# EAGLE board BLE -- HM-10 -- Breakout v0.9.4 (EAGLE 6.5.0)
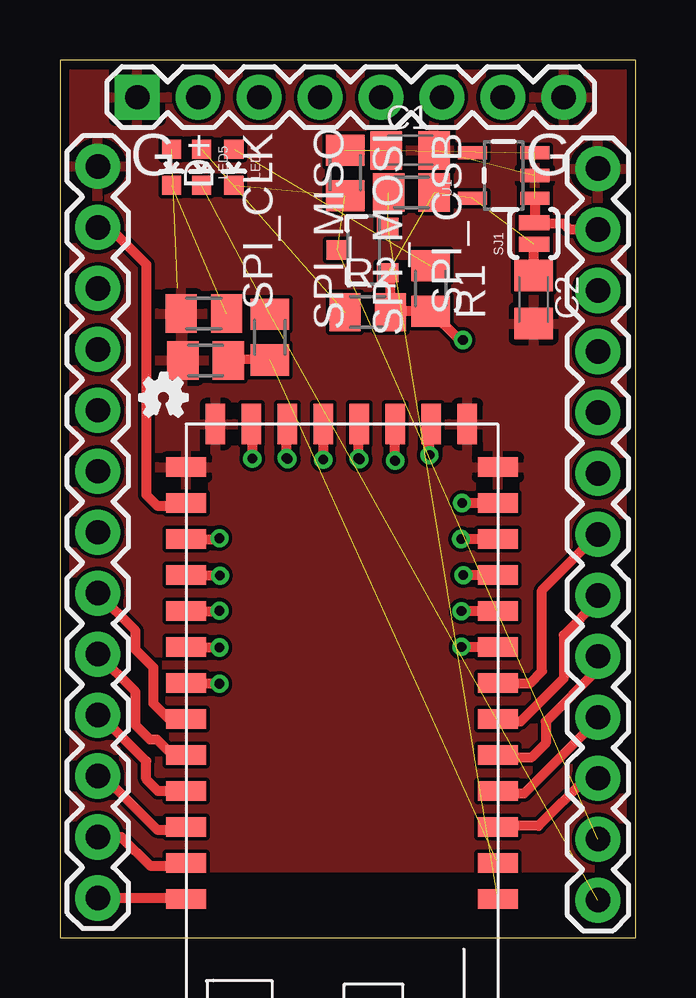
[diagram p0: board, top side]
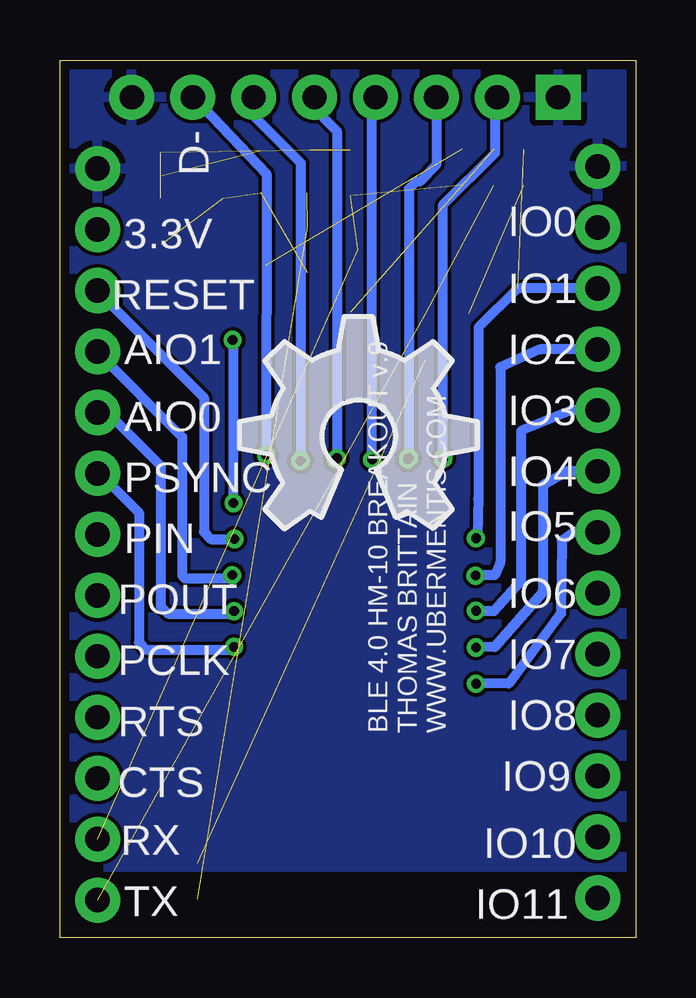
[diagram p1: board, bottom side, seen from below]

Size 24 x 36.57 mm. Coordinates in mm from the lower left corner, seen from the top.
Outline: 0,0 24,0 24,36.57 0,36.57 0,0
Copper layers (1*16): Top 0.0356mm / dielectric 1.5011mm / Bottom 0.0356mm
Design rules "LaenPCBOrder *": minimum track width 12mil, minimum drill 13mil, track to track 6mil, track to pad 6mil, pad to pad 6mil, via to via 6mil, smd to smd 6mil, copper to edge 15mil, drill to drill 6mil, minimum pad ring 7mil, minimum via ring 7mil, stop-mask expansion 4mil, vias tented up to drill 0mil, thermal gap 10mil

## Footprints (pad centres in the part's own frame; a part is rotated, then mirrored left to right if it is on the bottom)
SOT23-3 = smd 0.8 x 0.9: 1 -0.95,-1; 2 0.95,-1; 3 0,1.1
C0805K = smd 1.3 x 1.6: 1 -1,0; 2 1,0
1X13 = drill 1.016 pad 1.88: 1 0,0; 2 2.54,0; 3 5.08,0; 4 7.62,0; 5 10.16,0; 6 12.7,0; 7 15.24,0; 8 17.78,0; 9 20.32,0; 10 22.86,0; 11 25.4,0; 12 27.94,0; 13 30.48,0
1X08 = drill 1.016 pad 1.88 square: 1 0,0 | drill 1.016 pad 1.88: 2 2.54,0; 3 5.08,0; 4 7.62,0; 5 10.16,0; 6 12.7,0; 7 15.24,0; 8 17.78,0
LED-0603 = smd 0.8 x 0.8: A 0,-0.75; C 0,0.75
M0805 = smd 1.3 x 1.6: 1 -0.95,0; 2 0.95,0
SJ_2S-NO = smd 0.635 x 1.27: 1 -0.45,0; 2 0.45,0
SOT23-5 = smd 0.55 x 1.2: 1 -0.95,-1.3; 2 0,-1.3; 3 0.95,-1.3; 4 0.95,1.3; 5 -0.95,1.3
BLE-HM-10 = smd 1.676 x 0.813: 3.3V 0,3.29; AIO0 0,7.79; AIO1 0,6.29; GND1 0,1.79; GND4 13,1.79; PCM_CLK 0,13.79; PCM_IN 0,10.79; PCM_OUT 0,12.29; PCM_SYNC 0,9.29; PIO0 13,3.29; PIO1 13,4.79; PIO2 13,6.29; PIO3 13,7.79; PIO4 13,9.29; PIO5 13,10.79; PIO6 13,12.29; PIO7 13,13.79; PIO8 13,15.29; PIO9 13,16.79; PIO10 13,18.29; PIO11 13,19.79; RESET 0,4.79; UART_CTS 0,16.79; UART_RTS 0,15.29; UART_RX 0,18.29; UART_TX 0,19.79 | smd 0.813 x 1.676: GND2 1.27,0; GND3 11.77,0; SPI_CLK 8.77,0; SPI_CSB 4.27,0; SPI_MISO 7.27,0; SPI_MOSI 5.77,0; USB_D+ 10.27,0; USB_D- 2.77,0

## Placement (x,y rotation side)
BSS138  MOSFET-NCHANNELSMD  [SOT23-3]  12.67,28.65 90 top
C1  1uF  [C0805K]  14.6,32.8 0 top
C2  1uF  [C0805K]  19.75,26.59 270 top
JP1  M13  [1X13]  22.43,32.04 270 top
JP2  M13  [1X13]  1.58,1.65 90 top
JP3  [1X08]  3.22,35.02 0 top
LED2  [LED-0603]  4.65,32.1 180 top
LED4  [LED-0603]  7.25,32.1 180 top
LED5  [LED-0603]  5.9,32.1 180 top
R1  1k  [M0805]  15.45,27.05 270 top
R2  1k  [M0805]  12.83,26.06 0 top
R3  10k  [M0805]  8.76,25.02 270 top
R4  10k  [M0805]  6.07,24.05 180 top
R5  10k  [M0805]  11.89,31.86 90 top
R6  10k  [M0805]  14.66,31.04 0 top
R7  220  [M0805]  6,26 0 top
SJ1  SOLDERJUMPERNO  [SJ_2S-NO]  19.76,29.33 90 top
U1  V_REG_LDOSMD  [SOT23-5]  18.5,31.75 90 top
U$1  BLE-HM-10  [BLE-HM-10]  18.26,21.4 180 top
U$2  [OSHW_FILLX350_NOTEXT]  16.51,17.02 0 bottom
U$3  [OSHW_FILLX70_NOTEXT]  3.32,21.73 0 top

## Library data of the parts
BSS138 JP1-JP3 LED2 LED4 LED5 SJ1 U1 = SparkFun
C1 C2 R1-R7 = resistor
U$1 = Random parts
U$2 U$3 = ohw-logo

## Nets
3_3V: BSS138.1 C2.1 R1.2 R2.2 R6.2 SJ1.1 U1.5 U$1.3.3V
5V: C1.1 JP1.2 R5.2 SJ1.2 U1.1 U1.3
GND: C1.2 C2.2 JP1.1 JP2.13 JP3.1 JP3.8 R4.2 R7.1 U1.2 U$1.GND1 U$1.GND2 U$1.GND3 U$1.GND4
HVTX->LVRX: R3.2 R4.1 U$1.UART_RX
LVRX->HVTX: BSS138.2 R6.1 U$1.UART_TX
N$2: JP2.11 LED2.A U$1.PIO1
N$3: JP1.3 U$1.RESET
N$4: JP1.4 U$1.AIO1
N$5: JP1.5 U$1.AIO0
N$6: JP1.6 U$1.PCM_SYNC
N$7: JP1.7 U$1.PCM_IN
N$8: JP1.8 U$1.PCM_OUT
N$9: JP1.9 U$1.PCM_CLK
N$10: JP1.10 U$1.UART_RTS
N$11: JP1.11 U$1.UART_CTS
N$14: JP2.1 U$1.PIO11
N$15: JP2.2 U$1.PIO10
N$16: JP2.3 U$1.PIO9
N$17: JP2.4 U$1.PIO8
N$18: JP2.5 U$1.PIO7
N$19: JP2.6 U$1.PIO6
N$20: JP2.7 U$1.PIO5
N$21: JP2.8 U$1.PIO4
N$22: JP2.9 U$1.PIO3
N$23: JP2.10 U$1.PIO2
N$24: LED4.A R1.1
N$25: JP2.12 U$1.PIO0
N$26: LED2.C R7.2
N$27: LED5.A R2.1
N$28: JP3.2 U$1.USB_D+
N$29: JP3.3 U$1.SPI_CLK
N$30: JP3.4 U$1.SPI_MISO
N$31: JP3.5 U$1.SPI_MOSI
N$32: JP3.6 U$1.SPI_CSB
N$33: JP3.7 U$1.USB_D-
RX_HV: BSS138.3 JP1.12 LED4.C R5.1
TX_HV: JP1.13 LED5.C R3.1

## Tracks (layer width: path | path; a pad name or v marks a point on that pad's centre or on a via)
3_3V  (via drill 0.4)  (3 unrouted)
  Top 0.406: C2.1 SJ1.1 | U$1.3.3V v16.77,18.11 | v16.8,24.9 16.65,24.9 R1.2 13.82,26.1 R2.2 13.78,27.59 BSS138.1
  Bottom 0.406: v16.77,18.11 16.77,24.87 v16.8,24.9
5V  (3 unrouted)
  Top 0.406: JP1.2 21.25,29.5 21,29.75 19.8,29.75 SJ1.2 19.8,29.82 U1.1
GND  (1 unrouted)
  pour Bottom: -0.51,2.92 24.64,2.92 24.64,37.34 -0.51,37.34
  pour Top: 0.5,36 0.5,2.93 24,2.93 24,36.5 0.5,36.5
HVTX->LVRX  (1 unrouted)
  Top 0.406: R3.2 6.84,24.09 6.6,23.85 6.82,23.85 R4.1
LVRX->HVTX  (2 unrouted)
N$2  (via drill 0.4)  (1 unrouted)
  Top 0.406: U$1.PIO1 6.62,16.61 v6.65,16.64
  Bottom 0.406: JP2.11 4.9,27.05 6.55,25.42 6.55,18.27 6.57,17.64 6.59,16.59 v6.65,16.64
N$3  (via drill 0.4)
  Top 0.406: U$1.RESET v16.73,16.61
  Bottom 0.406: JP1.3 22.43,26.93 18,22.5 18,16.91 17.7,16.61 v16.73,16.61
N$4  (via drill 0.4)
  Top 0.406: U$1.AIO1 v16.82,15.11 v16.82,15.1
  Bottom 0.406: JP1.4 22.43,24.38 18.9,20.85 18.9,15.08 18.79,14.97 16.95,14.97 v16.82,15.1
N$5  (via drill 0.4)
  Top 0.406: U$1.AIO0 v16.74,13.61 v16.74,13.6
  Bottom 0.406: JP1.5 22.03,21.88 19.8,19.65 19.8,13.8 19.5,13.5 16.84,13.5 v16.74,13.6
N$6  (via drill 0.4)
  Top 0.406: U$1.PCM_SYNC 16.75,12.11 v16.74,12.12
  Bottom 0.406: JP1.6 22.34,19.34 20.7,17.7 20.7,12.3 20.4,12 16.86,12 v16.74,12.12
N$7
  Top 0.406: U$1.PCM_IN 19.61,10.61 20.1,11.1 20.1,14.47 JP1.7
N$8
  Top 0.406: JP1.8 22.43,14.03 21,12.6 21,10.8 19.2,9 18.45,9 | 18.45,9 17.7,9 | U$1.PCM_OUT 18.34,9.11 18.45,9
N$9
  Top 0.406: JP1.9 22.43,11.18 20.25,9 20.25,8.1 19.65,7.5 18.37,7.5 U$1.PCM_CLK
N$10
  Top 0.406: JP1.10 22.43,9.08 19.35,6 18.37,6 U$1.UART_RTS
N$11
  Top 0.406: JP1.11 21.94,6.64 19.95,4.65 18.3,4.65 U$1.UART_CTS
N$14
  Top 0.406: JP2.1 5.21,1.65 U$1.PIO11
N$15
  Top 0.406: JP2.2 2.56,4.19 3.75,3 5.15,3 U$1.PIO10
N$16
  Top 0.406: JP2.3 1.82,6.73 4.05,4.5 5.15,4.5 U$1.PIO9
N$17
  Top 0.406: JP2.4 1.68,9.27 3.6,7.35 3.6,6.6 4.09,6.11 U$1.PIO8
N$18
  Top 0.406: U$1.PIO7 4.69,7.61 4.05,8.25 3.75,8.25 3.15,8.85 3.15,10.24 JP2.5
N$19
  Top 0.406: U$1.PIO6 4.54,9.11 3.9,9.75 3.9,11.25 3.15,12 3.15,12.78 JP2.6
N$20  (via drill 0.4)
  Top 0.406: U$1.PIO5 6.62,10.61 v6.65,10.57
  Bottom 0.406: JP2.7 2.53,16.93 3.08,16.54 3.1,13.51 5.28,10.58 6.62,10.61 v6.65,10.57
N$21  (via drill 0.4)
  Top 0.406: U$1.PIO4 6.63,12.11 v6.65,12.09
  Bottom 0.406: JP2.8 2.83,19.43 3.87,18.84 3.87,14.39 5.87,12.11 v6.65,12.09
N$22  (via drill 0.4)
  Top 0.406: U$1.PIO3 6.64,13.61 v6.65,13.62
  Bottom 0.406: JP2.9 2.67,21.97 4.78,21.11 4.78,14.85 5.9,13.61 6.64,13.61 v6.65,13.62
N$23  (via drill 0.4)
  Top 0.406: U$1.PIO2 6.65,15.11 v6.67,15.08
  Bottom 0.406: JP2.10 3.99,24.51 5.64,23.77 5.64,15.63 5.87,15.11 6.65,15.11 v6.67,15.08
N$24  (1 unrouted)
N$25
  Top 0.406: JP2.12 2.06,29.59 3.6,28.05 3.6,18.45 4.05,18 5.15,18 U$1.PIO0
N$26  (1 unrouted)
N$27  (1 unrouted)
N$28  (via drill 0.4)
  Top 0.406: v8.02,19.96 8.02,21.36 U$1.USB_D+
  Bottom 0.406: v8.02,19.96 8.02,30.53 5.85,32.7 5.85,34.93 JP3.2
N$29  (via drill 0.4)
  Top 0.406: v9.45,19.99 9.45,21.36 U$1.SPI_CLK
  Bottom 0.406: JP3.3 8.3,32.2 9,31.5 9.15,31.5 9.45,31.2 v9.45,19.99 v9.49,19.94
N$30  (via drill 0.4)
  Top 0.406: v10.98,19.92 10.98,21.39 U$1.SPI_MISO
  Bottom 0.406: v10.98,19.92 10.98,34.88 JP3.4
N$31  (via drill 0.4)
  Top 0.406: v12.45,19.97 12.45,21.36 U$1.SPI_MOSI
  Bottom 0.406: JP3.5 13.38,34.53 12.45,33.6 v12.45,19.97 v12.49,19.93
N$32  (via drill 0.4)
  Top 0.406: v13.96,19.88 13.96,21.37 U$1.SPI_CSB
  Bottom 0.406: JP3.6 15.93,34.24 13.96,32.28 v13.96,19.88 v13.98,19.86
N$33  (via drill 0.4)
  Top 0.406: v15.41,20.1 15.41,21.32 U$1.USB_D-
  Bottom 0.406: JP3.7 18.41,35.02 15.39,31.83 v15.41,20.1 15.49,19.9
RX_HV  (3 unrouted)
TX_HV  (2 unrouted)

## Text on the board
tNames: D+ | SPI_CLK | SPI_MISO | SPI_MOSI | SPI_CSB | G | G | TX | CONN | RX
bNames: D- | IO0 | 3.3V | IO1 | RESET | IO2 | AIO1 | IO3 | AIO0 | IO4 | PSYNC | IO5 | PIN | IO6 | POUT | IO7 | PCLK | IO8 | BLE 4.0 HM-10 BREAKOUT v.9 / THOMAS BRITTAIN / WWW.UBERMENTIS.COM | RTS | IO9 | CTS | IO10 | RX | IO11 | TX